# Altium PCB PCB2.PcbDoc (part 2 of 2)
Units mil, origin at the board's own origin, x right, y up, seen from the top; angles counter-clockwise.
Board outline 1075 x 1370 mil, 4 copper layers (Top Layer, Ground, Power, Bottom Layer), stack 61.4 mil thick; 62 components, 54 nets, 255 pads, 74 vias.
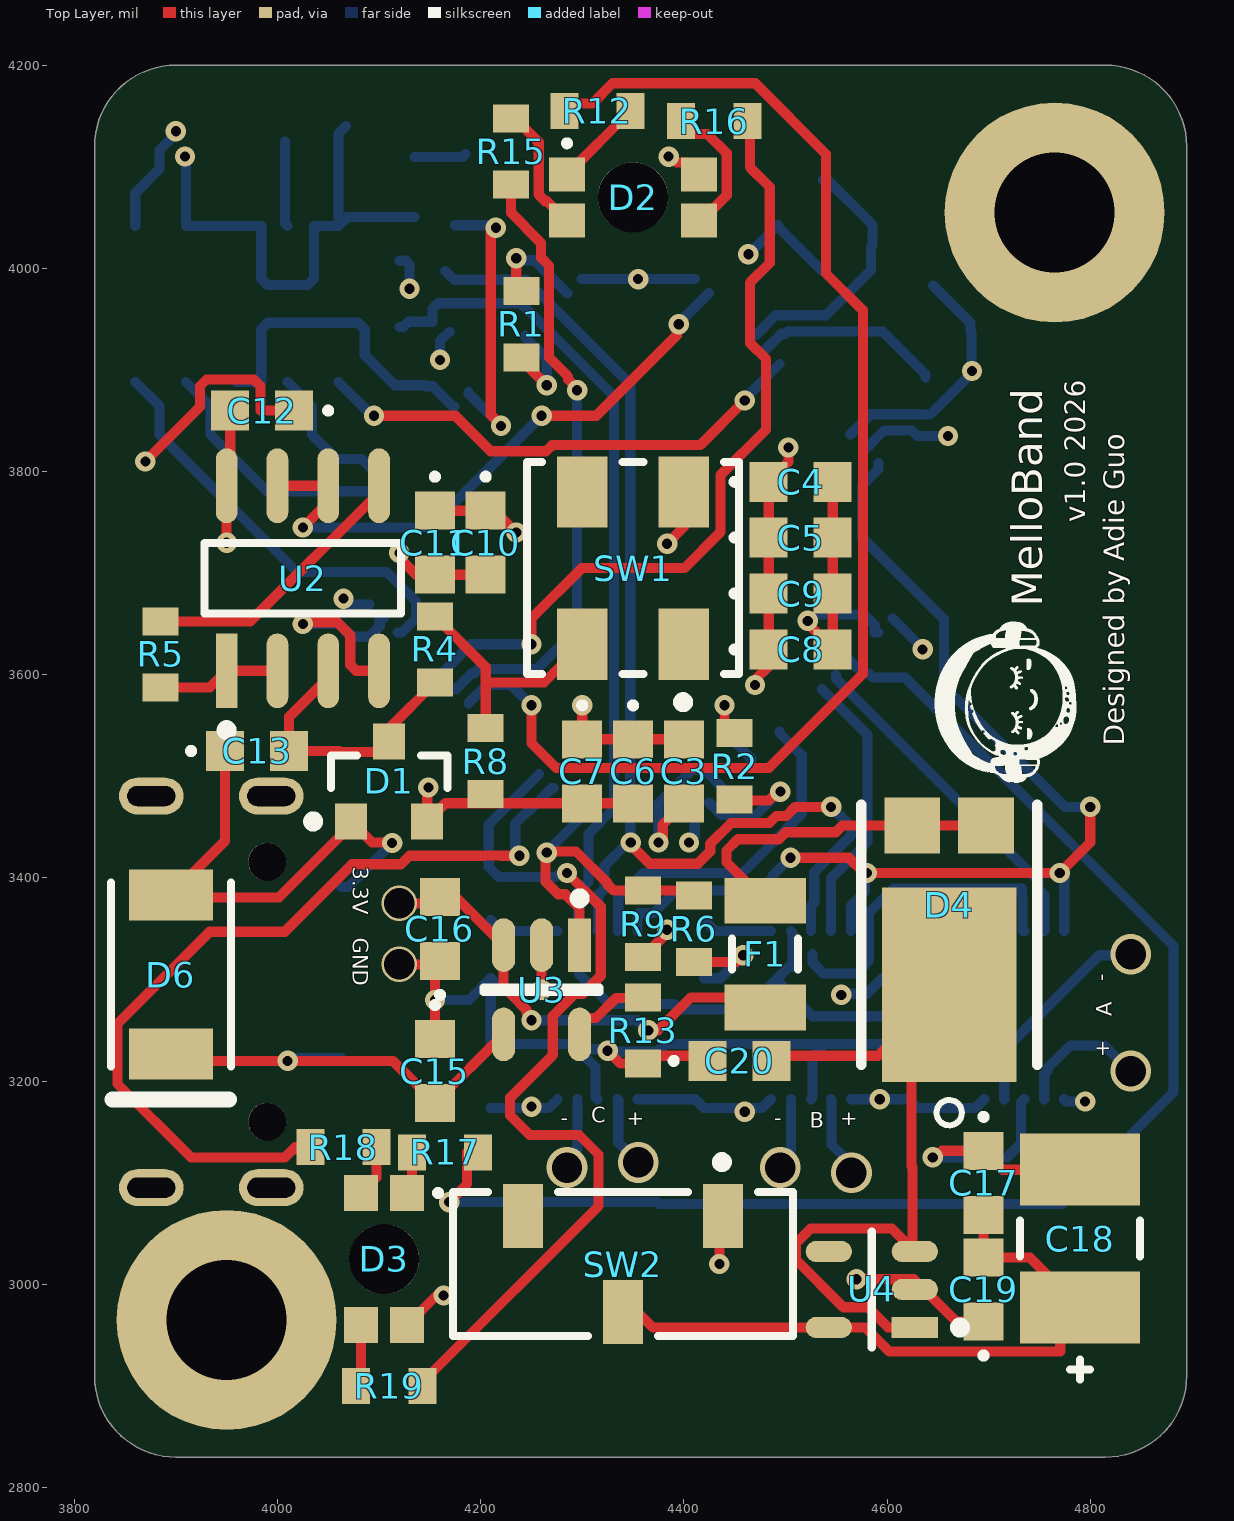
[diagram p0: Top Layer view]

## Via types
v1: diameter 20, hole 10, Top Layer to Bottom Layer, tented both sides, 66 vias
v2: diameter 40, hole 30, Top Layer to Bottom Layer, 6 vias
v3: diameter 35, hole 30, Top Layer to Bottom Layer, 2 vias

## Nets (pads, with @x,y where several pads share a name; then routed paths per layer and width w, separated by ;. In a path a pad name is that pad's centre, name@x,y a point inside that pad or via, vN(x,y) a via of type N, cw(c..) or ccw(c..) an arc to the next point about the centre after c; other vN are vias at no path point) (continued)
MOTOR_SDA: (continued)
  Top Layer w10: v1(4347.71,3435) 4347.71,3432.6 4366.3,3414 4413.7,3414 4426,3426.3 4426,3433.63 4446.53,3454.16 4484.08,3454.16 4490.89,3460.97 4500.67,3460.97 4509.7,3470 v1(4545,3470)
  Bottom Layer w10: R10.1@4165,3997.56 4173.71,3988.85 4244.26,3988.85 4347.18,3885.93 4347.18,3435.52 v1(4347.71,3435) 4345,3435 4322,3412 4322,3389.67 4315.72,3383.4 4315.72,3348.43 U7.3 ; U6.3 4525,3372.48 4528.29,3375.78 4528.29,3405.62 4564.7,3442.02 4564.7,3450.3 v1(4545,3470) ; U6.3@4526.79,3325 4526.79,3316.55 4537.27,3306.07 4569.66,3306.07 4582.26,3318.67 4582.26,3365.81 4605.8,3389.35 4733,3389.35 4733,3382.37 4733.2,3382.17 4733.2,3347.71 U5.3
NetC3_2: C3.2 U1.30 | length 172
  Top Layer w10: v1(4375,3435) 4379.19,3439.19 4379.19,3452.69 C3.2
  Bottom Layer w10: v1(4375,3435) 4375,3473.64 4407.67,3506.31 4420.58,3506.31 U1.30
NetC13_2: C13.2 D1.3 R4.2 U2.3 | length 274.8
  Top Layer w10: U2.3 4050,3597.14 4011.5,3558.64 C13.2 4060.3,3525 4061.3,3524 4099.63,3524 D1.3 4110,3547.44 R4.2
NetC15_2: C15.2 D6.2 J2.C2 U3.4 | length 429.4
  Top Layer w10: D6.2 3901.85,3220 v1(4010,3220) 4113.5,3220 C15.2 ; C15.2 U3.4
  Bottom Layer w10: v1(4010,3220) 4012.87,3222.87 J2.C2@4062.6,3222.87
NetC17_2: C17.2 C18.2 C19.2 SW2.2 U4.5 | length 666.3
  Top Layer w10: SW2.2@4336.57,2990.51 4369.49,2957.6 U4.5 4578.6,2957.6 4602.39,2933.8 4770.51,2933.8 4770.51,2957.6 C18.2 4740.59,3026.5 C19.2 C17.2
NetC20_2: C20.2 D4.2 U4.1 U4.3 | length 721.8
  Top Layer w10: C20.2@4486.5,3225 4591.22,3225 D4.2@4625,3258.78 ; U4.1 4601.23,2957.6 4581.3,2977.53 4557.04,2977.53 4510.42,3024.15 4510.42,3040.66 4524.76,3055 4604.74,3055 U4.3@4625,3034.74 ; U4.3 U4.3@4625,3034.74 ; D4.2 D4.2@4625,3258.78 ; U4.3@4625,3034.74 4625,3115.3 4624,3116.3 4624,3257.78 D4.2@4625,3258.78
NetC22_1: C22.1 U5.1 | length 70.1
  Bottom Layer w10: C22.1 4640.91,3347.71 U5.1
NetC23_1: C23.1 U6.1 | length 70.1
  Bottom Layer w10: C23.1 4430.91,3347.71 U6.1
NetC25_1: C25.1 U7.1 | length 70.1
  Bottom Layer w10: C25.1 4220.91,3347.71 U7.1
NetD2_1: D2.1 R12.1 | length 88.4
  Top Layer w10: D2.1 4285.2,4092.64 R12.1
NetD2_2: D2.2 R15.1 | length 126.8
  Top Layer w10: R15.1 4233.94,4147.56 4257.22,4124.28 4257.22,4072.58 4263.63,4066.17 4265.25,4066.17 4284.06,4047.36 D2.2
NetD2_3: D2.3 R16.1 | length 138.9
  Top Layer w10: R16.1 4397.44,4141.06 4406.22,4132.28 4423.2,4132.28 4442.18,4113.31 4442.18,4071.97 4429.3,4059.09 4426.69,4059.09 D2.3
NetD3_1: D3.1 R17.1 | length 42
  Top Layer w10: D3.1 4132.44,3094.76 R17.1
NetD3_2: D3.2 R18.1 | length 51.3
  Top Layer w10: D3.2 4097.56,3105.16 R18.1
NetD3_3: D3.3 R19.1 | length 62.1
  Top Layer w10: R19.1 4082.36,2904.92 D3.3
NetD4_1: D4.1 F1.2 | length 330.9
  Top Layer w10: F1.2 4442,3415.5 4442,3427 4453.16,3438.16 4493.46,3438.16 4500.27,3444.97 4549.67,3444.97 4556.47,3451.77 4625,3451.77 D4.1@4697.44,3451.77
NetD5_2: D5.2 R14.2 | length 51.3
  Bottom Layer w10: D5.2 4181.97,4109.53 R14.2
NetJ1_7: J1.7 R3.1 | length 84.3
  Bottom Layer w10: R3.1@4007.44,4125 4007.44,4044.33 J1.7
NetR4_1: R4.1 R8.1 SW1.1_2+ | length 241.3
  Top Layer w10: R4.1 4205,3607.56 4205,3592.44 ; R8.1 4205,3592.44 ; SW1.1_2+ 4262.44,3592.44 4205,3592.44
NetR5_1: R5.1 U2.1 U2.2 | length 121.8
  Top Layer w10: R5.1 3933.53,3587.44 U2.1 U2.2
NetR5_2: R5.2 U2.5 | length 274.3
  Top Layer w10: R5.2 3973.25,3652.56 4100,3779.31 U2.5
NetR13_2: R13.2 U3.5 | length 83.7
  Top Layer w10: U3.5 4297.4,3256.3 4303.29,3262.19 4313.54,3262.19 4333.14,3281.79 4359.23,3281.79 R13.2
NRST: J1.10 U1.7 | length 499.1
  Top Layer w10: v1(4095,3855) 4175,3855 4210,3820 4264.4,3820 4270.44,3826.04 4416.04,3826.04 v1(4460,3870)
  Bottom Layer w10: J1.10 4093.23,3855 v1(4095,3855) ; v1(4460,3870) 4460,3871.76 U1.7
OSC_IN: C1.2 U1.5 X1.1 | length 256.7
  Bottom Layer w10: U1.5 4470.15,3933.79 4490.17,3953.81 4539.85,3953.81 4584.15,3998.11 4584.15,4020.73 4585.82,4022.4 4585.82,4042.62 X1.1 4541.17,4087.27 C1.2
OSC_OUT: C2.2 U1.6 X1.3 | length 185.5
  Bottom Layer w10: U1.6 U1.6@4496.12,3935.71 ; U1.6@4496.12,3935.73 4499.93,3935.73 4502.01,3937.81 4595.97,3937.81 X1.3 4637.73,3896.06 C2.2
TCK/SWCLK: J1.4 U1.49 | length 241.3
  Bottom Layer w10: J1.4 3934.04,3864.19 3934.04,3836.43 3989.79,3780.68 U1.49
TDI: J1.8 U1.50 | length 149.5
  Bottom Layer w10: J1.8 4034.04,3864.19 4034.04,3836.43 4057.93,3812.54 4082.71,3812.54 4100.65,3794.6 U1.50
TDO: J1.6 U1.55 | length 317.6
  Bottom Layer w10: J1.6 3984.04,3888.23 3984.04,3940.03 3990.48,3946.47 4040.48,3946.47 4079.52,3946.47 4085.96,3940.03 4085.96,3914.43 4115.39,3885 4145.3,3885 4146.3,3884 4152.83,3884 4172.63,3864.19 U1.55
TMS/SWDIO: J1.2 U1.46 | length 422.5
  Bottom Layer w10: J1.2 3884.04,3864.19 3884.04,3836.43 4019.29,3701.18 4107.46,3701.18 4136.31,3672.33 4136.31,3655.63 4122.17,3641.48 U1.46
VCC: C4.2 C5.2 C6.2 C7.2 C8.2 C9.2 C10.2 C11.2 C12.2 C14.2 C21.2 C24.2 D1.2 D2.4 D3.4 J1.1 R8.2 R9.2 R10.2 R11.2 SW2.1 U1.1 U1.13 U1.19 U1.32 U1.48 U1.64 U2.8 U5.6 U5.10 U6.6 U6.10 U7.6 U7.10 | length 1750.8
  Top Layer w10: v1(3950,3730) U2.8 3953.5,3789.59 C12.2 ; v1(4120,3720) 4120.31,3719.69 4120.31,3714.69 4136.5,3698.5 C11.2 C10.2 ; D3.4 4156.6,2989 v1(4163.55,2989) ; v1(4148.55,3489) 4147.4,3487.85 D1.2 4165.28,3473.5 C7.2 C6.2 ; R9.2 4383.55,3346 v1(4383.55,3349) ; v1(4385,4110) 4387.71,4110 4393.34,4104.37 4403.23,4104.37 D2.4 ; v1(4435,3020) SW2.1@4435,3085 ; v1(4521.91,3653.09) 4521.91,3650.57 4546.5,3625.98 C8.2 C9.2 C5.2 C4.2
  Bottom Layer w10: J1.1 3860,4074.06 3883.94,4098 3883.94,4116.24 3900,4132.29 v1(3900,4135) ; v1(4065,3675) 4070.68,3669.32 U1.48 ; R11.2@4120,4007.56 4126.22,4007.56 4130,4003.78 v1(4130,3980) ; v1(4160,3910) 4160,3928.66 4168.78,3937.44 R10.2@4170,3937.44 ; C24.2 4266.84,3173.5 U7.10 ; U1.64 U1.1 ; U7.6 4411.21,3182.29 C21.2 4476.84,3173.5 U6.10 ; v1(4405,3435) 4410.68,3440.68 U1.32 ; v1(4521.91,3653.09) 4524.62,3653.09 4530.96,3659.42 4577.49,3659.42 4587.83,3649.08 4587.83,3641.48 U1.19 ; U6.6 4621.21,3182.29 C14.2 4686.84,3173.5 U5.10 ; U1.13 4579.12,3822.44 4597.06,3840.38 4624.49,3840.38 4629.87,3835 v1(4660,3835) ; U5.6 4774.37,3181.75 4776.12,3180 v1(4795,3180)
  other v1: 4460,3170 4250,3175 4592.79,3182.29 4355,3989.47
pads on no net: D2.MH1 D3.MH1 J2. J2.1 J2.2 J2.3 J2.4 J2.C1 J2.C3 J2.C4 J2.C5 SW1.1_1- SW1.2_2+ SW2.3 U1.3 U1.4 U1.8 U1.9 U1.10 U1.11 U1.15 U1.16 U1.17 U1.20 U1.24 U1.25 U1.27 U1.29 U1.34 U1.37 U1.38 U1.39 U1.40 U1.44 U1.45 U1.51 U1.52 U1.53 U1.54 U1.57 U1.58 U1.59 U4.4

## Polygon pours and split planes (outlines as drawn)
BATT_GND on Ground "BATT_GND_L02_P000" (solid, pour order 0): 3705,4355 4965,4355 4965,2780 3710,2780 3700,2790
VCC on Power "VCC_L03_P001" (solid, pour order 1): 3765,4255 4940,4255 4940,2825 4935,2820 4930,2825 3760,2825

## Silkscreen, mask and mechanical layers (free items; w line width, h text height)
Top Overlay:
  drawing of 7 lines, arcs and shapes, not listed
  text "v1.0 2026" at 4795,3750 h20 r90
  text "MelloBand" at 4753,3667 h30 r90
  text "Designed by Adie Guo" at 4833.34,3530 h20 r90
  text "3.3V" at 4074,3411 h15 r270
  text "GND" at 4074,3341 h15 r270
  text "-" at 4806.5,3306 h15 r270
  text "A" at 4821,3264 h15 r90
  text "+" at 4806.5,3241 h15 r270
  text "C" at 4309,3159 h15
  text "-" at 4279,3156.5 h15
  text "+" at 4344,3156.5 h15
  text "-" at 4489,3156.5 h15
  text "+" at 4554,3156.5 h15
  text "B" at 4524,3154 h15
Mechanical 1:
  the board outline again, w10